# Altium PCB FT232RL Model with USB-C.PcbDoc
Units mil, origin at the board's own origin, x right, y up, seen from the top; angles counter-clockwise.
Board outline 1655 x 760 mil, 2 copper layers (Top Layer, Bottom Layer); 20 components, 28 nets, 107 pads, 45 vias.
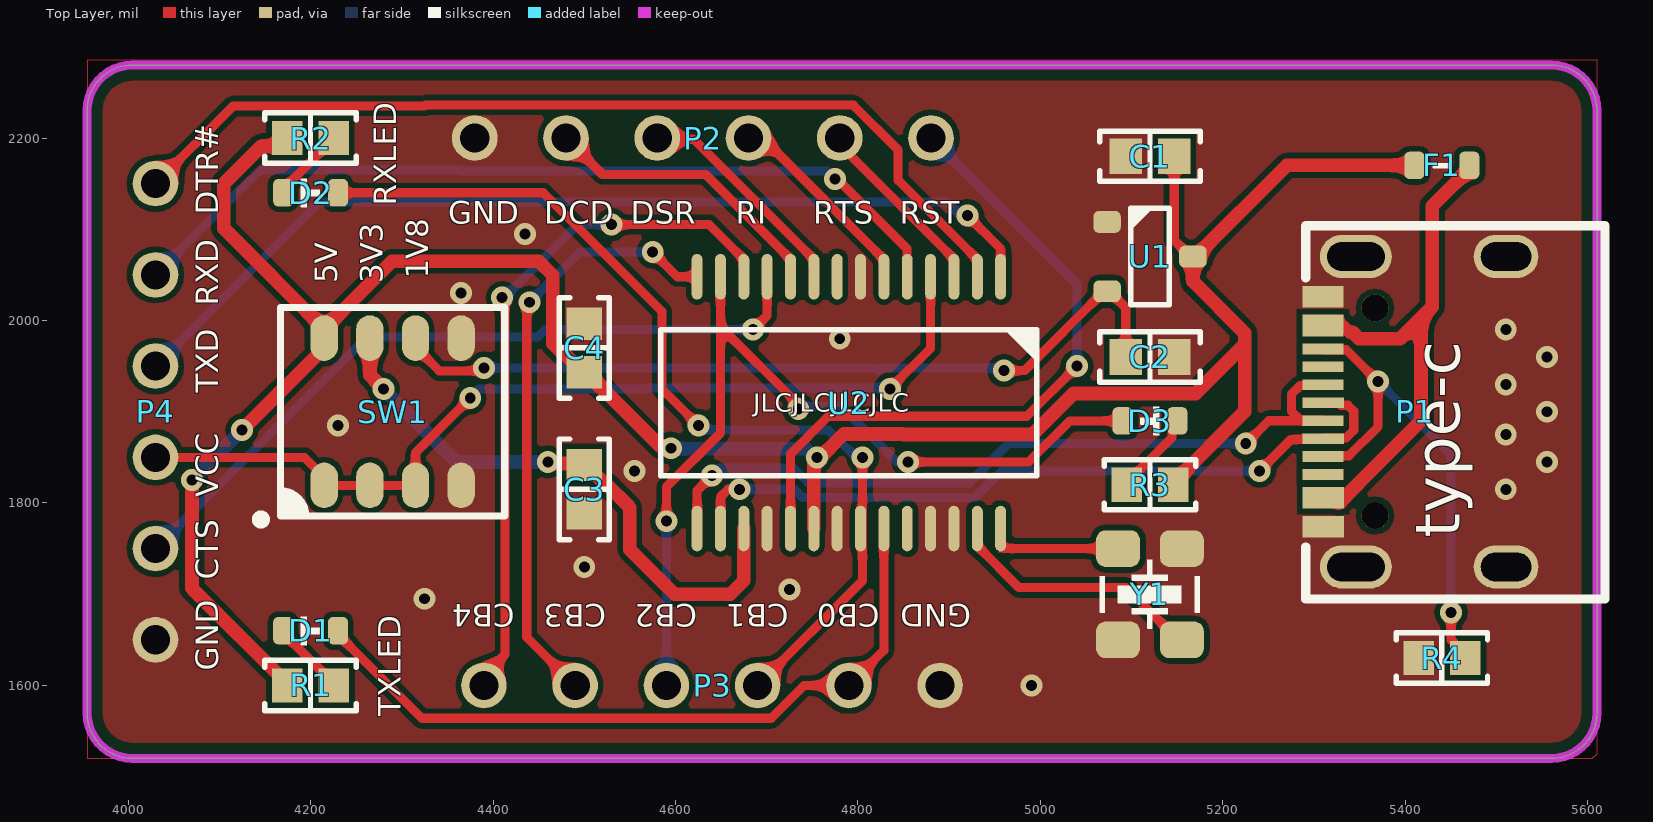
[diagram p0: Top Layer view]
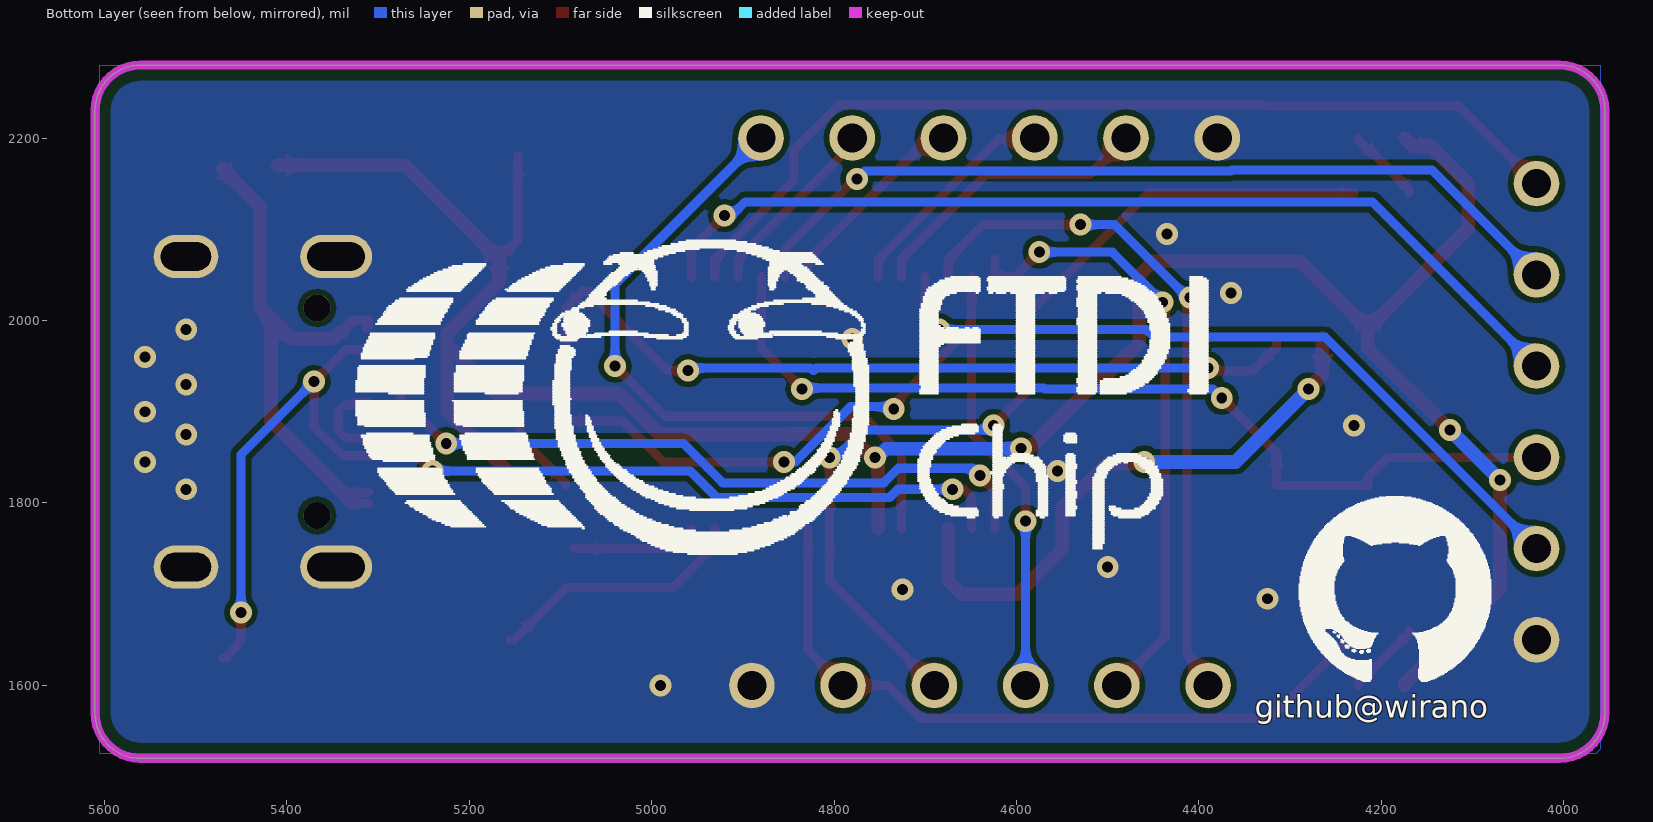
[diagram p1: Bottom Layer view, seen from below]
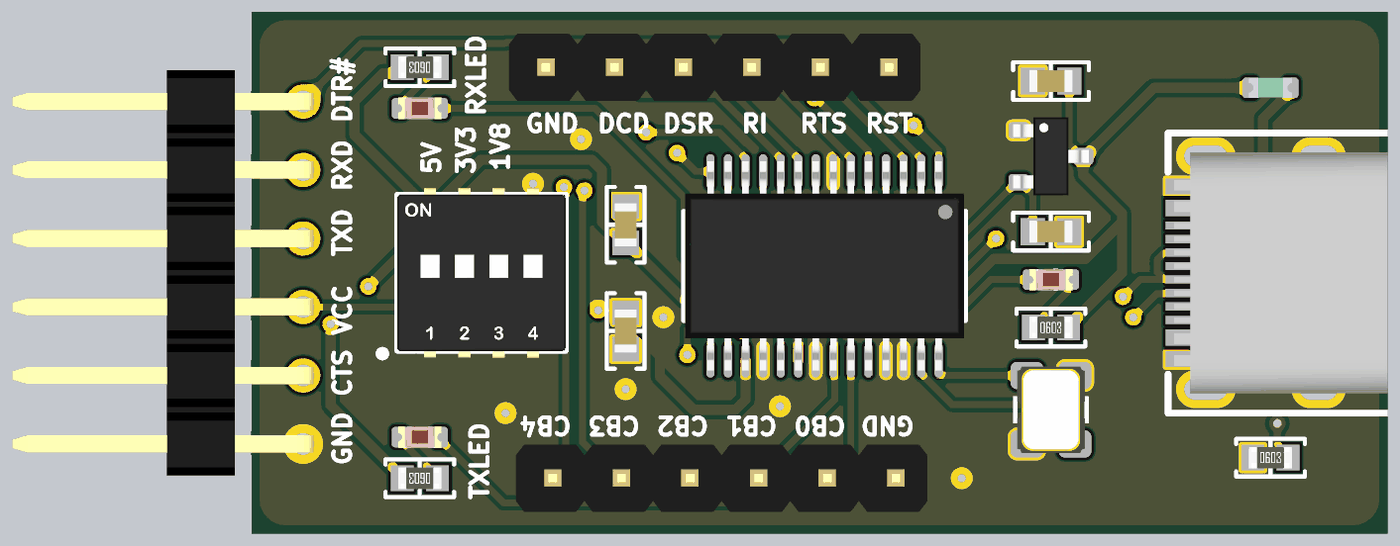
[diagram p2: 3D render of the assembled board from above, using the file's embedded part models]

## Layer stack, top to bottom
Top Solder: solder mask 0.4, Solder Resist, Dk 3.5
Top Layer: signal copper 1.4
Dielectric 1: dielectric 12.6, FR-4, Dk 4.8
Bottom Layer: signal copper 1.4
Bottom Solder: solder mask 0.4, Solder Resist, Dk 3.5

## Board outline
3955,1570 ccw(c4005,1570) 4005,1520 5560,1520 ccw(c5560,1570) 5610,1570 5610,2230 ccw(c5560,2230) 5560,2280 5560.1,2280 4005,2280 ccw(c4005,2230) 3955,2230

## Design rules (kind name [scope] priority, off if disabled: settings)
Clearance keepoutlayer [(InLayerClass('Signal Layers')) vs (OnLayer('Keep-Out Layer'))] p1: gap=12 ignorepadtopadclearanceinfootprint=FALSE
Clearance [All] p2: gap=6 ignorepadtopadclearanceinfootprint=FALSE
HoleSize [All] p1: absolutevalues=TRUE maxlimit=248 minlimit=8 maxpercent=80.000 minpercent=20.000
HoleToHoleClearance [All] p1: gap=6 allowstackedmicrovias=TRUE
MinimumSolderMaskSliver [All] p1: minsoldermaskwidth=5
PolygonConnect [All] p1: connectstyle=Direct reliefconductorwidth=10 reliefentries=4 polygonreliefangle="90 Angle" airgapwidth=10
RoutingVias [All] p1: holewidth=12 width=24 viastyle="Through Hole" minholewidth=12 minwidth=24 maxholewidth=24 maxwidth=32
SilkToSilkClearance [All] p1: silktosilkclearance=1
SilkToSolderMaskClearance [IsPad] p1: minsilkscreentomaskgap=1 clearancetoexposedcopper=TRUE
SolderMaskExpansion [All] p1: expansion=4 istentingtop=FALSE
Width Width_Power [InNet('3V3') And InNet('VCC')  And InNet('VBUS')] p1: maxlimit=100 minlimit=10 preferedwidth=15
Width [All] p2: maxlimit=50 minlimit=6 preferedwidth=10
25 further rules are at their usual default settings.

## Components (designator, comment, footprint, x,y, rotation, side; value= is the part's Value field where it differs from the comment)
C1 "C0603" "CAP 0603/1608" 5120,2180 r0 top value=105
C2 "C0603" "CAP 0603/1608" 5120,1960 r180 top value=105
C3 "C0603" "CAP 0603/1608" 4500,1815 r270 top value=104
C4 "C0603" "CAP 0603/1608" 4500,1970 r270 top value=104
D1 "R" LED_0603_RED 4200,1660 r0 top
D2 "R" LED_0603_RED 4200,2140 r0 top
D3 "R" LED_0603_RED 5120,1890 r180 top
F1 "?mA" PPTC_0603 5440,2170 r180 top
P1 "TypeC" USB_TypeC 5410,1900 r90 top
P2 "DIP 1x6" HDR1X6_2.54_180 4880,2200 r270 top value=2.54
P3 "DIP 1x6" HDR1X6_2.54_180 4890,1600 r270 top value=2.54
P4 "DIP 1x6" HDR1X6_2.54_90 4030,1650 r180 top value=2.54
R1 "R0603" "RES 0603/1608" 4200,1600 r180 top value=1K
R2 "R0603" "RES 0603/1608" 4200,2200 r180 top value=1K
R3 "R0603" "RES 0603/1608" 5120,1820 r0 top value=1K
R4 "R0603" "RES 0603/1608" 5440,1630 r0 top value=5.1K
SW1 "=PartNumber" "CTS 218-4LPJ" 4290,1900 r90 top
U1 "XC6206P182MR" _SOT23-3 5120,2070 r0 top
U2 "FT232R" _SSOP_E210_P0.65_28 4790,1910 r270 top
Y1 "XTAL3225" XT_3225_4 5120,1700 r270 top value=12MHz

## Footprints (in the part's own frame and the unit in brackets; to place one, negate y for a bottom-side part, rotate by r counter-clockwise, add the part's x,y. Pads: shape width x height; smd on the part's side, far side on the other; paste and mask are expansions set on the pad)
_SOT23-3 [mil]
  rrect50% 30x24 smd: 1(-47,38) 2(-47,-38) 3(47,0)
  silkscreen extent -21,-53 21,53, body extent -55,-57 55,57, height 51
_SSOP_E210_P0.65_28 [mil]
  oval 50x12 smd: 1(-138,166.34) 2(-138,140.75) 3(-138,115.16) 4(-138,89.57) 5(-138,63.98) 6(-138,38.39) 7(-138,12.8) 8(-138,-12.8) 9(-138,-38.39) 10(-138,-63.98) 11(-138,-89.57) 12(-138,-115.16) 13(-138,-140.75) 14(-138,-166.34) 15(138,-166.34) 16(138,-140.75) 17(138,-115.16) 18(138,-89.57) 19(138,-63.98) 20(138,-38.39) 21(138,-12.8) 22(138,12.8) 23(138,38.39) 24(138,63.98) 25(138,89.57) 26(138,115.16) 27(138,140.75) 28(138,166.34)
  silkscreen extent -80,-206 80,206, body extent -153,-203 153,203, height 85
"CAP 0603/1608" [mm] "Chip Capacitor, 2-Leads, Body 1.60x0.80mm, IPC Medium Density"
  rect 0.9x1 smd: 1(-0.675,0) 2(0.675,0)
  silkscreen extent -1.4,-0.7 1.4,0.7, body extent -0.8,-0.41 0.8,0.41, height 0.82
"CTS 218-4LPJ" [mm] "DIP, 6 POS, Body 8.79x6.05mm, Pitch 1.27mm, IPC Medium Density"
  oval 1.27x0.76 smd: 1(-2.05,1.905) 2(-2.05,0.635) 3(-2.05,-0.635) 4(-2.05,-1.905) 5(2.05,-1.905) 6(2.05,-0.635) 7(2.05,0.635) 8(2.05,1.905)
  silkscreen extent -3.12,-3.12 2.9,3.79, body extent -3.15,-3.13 3.15,3.12, height 2.71
HDR1X6_2.54_90 [mil]
  round 50 hole 32: 1(0,0) 2(0,-100) 3(0,-200) 4(0,-300) 5(0,-400) 6(0,-500)
  body extent -15,-546 424,46, height 99
HDR1X6_2.54_180 [mil]
  round 50 hole 32: 1(0,0) 2(0,-100) 3(0,-200) 4(0,-300) 5(0,-400) 6(0,-500)
  body extent -49,-550 49,50, height 323
LED_0603_RED [mil]
  rrect50% 22x30 smd: 1(-30,0) 2(30,0)
  silkscreen extent -10,-16 10,16, body extent -31,-16 32,16, height 21
PPTC_0603 [mil]
  rrect50% 22x30 smd: 1(-30,0) 2(30,0)
  silkscreen extent -10,-3 10,3, body extent -31,-15 32,15, height 30
"RES 0603/1608" [mm] "Chip Resistor, 2-Leads, Body 1.60x0.80mm, IPC Medium Density"
  rect 0.85x0.95 smd: 1(-0.65,0) 2(0.65,0)
  silkscreen extent -1.27,-0.7 1.27,0.7, body extent -0.8,-0.4 0.8,0.4, height 0.48
USB_TypeC [mm]
  oval 1.2x1.8 hole 0.8 slot 1.4 at 90 deg: 0(-4.32,-2.547) 0(4.32,-2.547)
  oval 1.2x2 hole 0.8 slot 1.6 at 90 deg: 0(-4.32,1.633) 0(4.32,1.633)
  rect 0.3x1.15 smd: A1(-3.35,2.546) A4(-2.55,2.543) A5(-1.25,2.547) A6(-0.25,2.547) A7(0.25,2.546) A8(-1.75,2.547) A9(2.55,2.547) A12(3.35,2.547) B1(3.05,2.547) B4(2.25,2.547) B5(1.75,2.547) B6(0.75,2.547) B7(-0.75,2.546) B8(1.25,2.547) B9(-2.25,2.543) B12(-3.05,2.546)
  round 0.75 hole 0.75 unplated: ""(-2.89,1.102) ""(2.89,1.102)
  silkscreen extent -5.21,-5.3 5.18,3.03, body extent -4.47,-5.1 4.47,2.8, height 3.21
XT_3225_4 [mil]
  rrect50% 40x48 smd: 1(-50,-35) 2(50,-35) 3(50,35) 4(-50,35)
  silkscreen extent -38,-55 38,55, body extent -63,-49 63,49, height 41

## Part data
C1 C2 C3 C4: library part Cap_0603, "Capacitor", Specification="X7R 50V", Type=0603
D1 D2 D3: library part LED_0603, "LED", Type=0603
F1: library part Fuse, "resettable fuse"
P1: library part USB_TypeC, "USB type-c cable"
P2 P3 P4: library part HDR1x6_2.54, "Header", Type="DIP 1x6"
R1 R2 R3 R4: library part Res_0603, "SMT Resistor", Specification=±5%, Type=0603
SW1: library part 218-4LPSTR, "SWITCH SLIDE DIP SPST 25MA 24V", Current Rating (Amps)=25mA, Manufacturer="CTS Electrocomponents", Operating Temperature="-55°C ~ 85°C", Supplier Part Number 1=CT3110CT-ND, Voltage Rating=24VDC, Actuator Level="Flush, Recessed", Actuator Type="Slide (Standard)", Circuit=SPST, ComponentLink1Description=Datasheet, ComponentLink1URL=https://www.ctscorp.com/wp-content/uploads/218.pdf, ComponentLink2Description="DigiKey Link", ComponentLink2URL=http://digikey.com/product-detail/en/cts-electrocomponents/218-4LPSTR/CT3110CT-ND/5875763, Contact Finish=Gold, Contact Material="Beryllium Copper", Features="Epoxy Sealed Terminals, Tape Seal", Height Above Board="0.104\" (2.65mm)", LastUpdated="20/1/4 周六 18:53:14", Lifecycle Status=Active, Minimum Order=1, Mounting Type="Surface Mount", Number of Positions=4, Packaging=ReReel, Part Number=218-4LPSTR, Part Status=Active, PartId=9, Pitch="0.050\" (1.27mm), Half", Price=0.00, Series=218, Supplier 1=DigiKey, Termination Style="Gull Wing", Washable=Yes
U1: library part XC6206P332MR, "Regulator LDO"
U2: "USB to UART Converter"
Y1: library part XTAL_3225_4P, "Crystal Oscillator", Type=XTAL3225

## Via types
v1: diameter 24, hole 12, Top Layer to Bottom Layer, 45 vias

## Nets (pads, with @x,y where several pads share a name; then routed paths per layer and width w, separated by ;. In a path a pad name is that pad's centre, name@x,y a point inside that pad or via, vN(x,y) a via of type N, cw(c..) or ccw(c..) an arc to the next point about the centre after c; other vN are vias at no path point)
1V8: C2.2 SW1.6 U1.2 | length 901.8
  Top Layer w10: SW1.6 4315,1970.67 4340.96,1944.71 4386.71,1944.71 v1(4390,1948) ; v1(4960,1945) 4982.46,1945 5069.46,2032 U1.2 5075.46,2032 5093.43,2014.03 C2.2
  Bottom Layer w10: v1(4390,1948) 4819.47,1948 4822.47,1945 4825.47,1948 4957,1948 v1(4960,1945)
3V3: C3.1 SW1.7 U2.17 | length 640.3
  Top Layer w15: SW1.7 4265,1940 v1(4280,1925) ; v1(4460,1845) 4461.71,1843.29 4498.29,1843.29 C3.1 4501.97,1841.57 4522.79,1820.75 4524.17,1820.75 4550,1794.92 4550,1748.82 4598.82,1700 4660,1700 4674.84,1714.84 U2.17
  Bottom Layer w15: v1(4280,1925) 4360,1845 v1(4460,1845)
CBUS0: D1.2 P3.2 U2.23 | length 804.9
  Top Layer w10: D1.2 4230,1656 4322,1564 4704.91,1564 4740.91,1600 P3.2 4828.39,1638.39 U2.23
CBUS1: D2.2 P3.3 U2.22 | length 1042.5
  Top Layer w10: D2.2 4455,2140 4585,2010 4585,1925 v1(4625,1885) ; P3.3 4805,1715 v1(4805,1850)
  Bottom Layer w10: v1(4625,1885) 4630,1880 4767.53,1880 4797.53,1850 v1(4805,1850)
CBUS2: D3.2 P3.4 U2.13 | length 998.4
  Top Layer w10: v1(4590,1780) 4590,1817.47 4649.25,1876.72 4649.25,1993.22 ; U2.13 4649.25,1993.22 ; v1(4734.51,1903) 4732.85,1904.66 4732.85,1909.62 4649.25,1993.22 ; v1(4855,1845) 4987.33,1845 5032.33,1890 D3.2
  Bottom Layer w10: P3.4 v1(4590,1780) ; v1(4734.51,1903) 4737.11,1905.6 4781.92,1905.6 4842.53,1845 v1(4855,1845)
CBUS3: P3.5 U2.14 | length 680.4
  Top Layer w10: v1(4440,2020) 4437,2017 4437,1653 P3.5 ; v1(4575,2075) 4602,2048 U2.14 U2.14@4623.66,2067.54
  Bottom Layer w10: v1(4440,2020) 4495,2075 v1(4575,2075)
CBUS4: P3.6 U2.12 | length 768.5
  Top Layer w10: P3.6 4390,1610.82 4413,1633.82 4413,2022 v1(4410,2025) ; v1(4530,2105) 4636.84,2105 4674.84,2067 U2.12
  Bottom Layer w10: v1(4410,2025) 4412.47,2025 4492.47,2105 v1(4530,2105)
CC: P1.A5 P1.B5 R4.2 | length 546.2
  Top Layer w10: P1.A5 5310.61,1851.7 5337.97,1851.7 5370,1883.73 v1(5370,1933) 5335.01,1967.99 5310.61,1967.99 P1.B5 ; v1(5450,1680) 5450,1650 5453.86,1646.14 5453.86,1643.7 R4.2@5467.56,1630 ; R4.2 R4.2@5467.56,1630 ; R4.2@5470,1630 R4.2@5467.56,1630
  Bottom Layer w10: v1(5370,1933) 5450,1853 v1(5450,1680)
CTS#: P4.2 U2.11 | length 818.8
  Top Layer w10: v1(4685,1990) 4700.43,2005.43 U2.11
  Bottom Layer w10: P4.2 4262,1982 4449.53,1982 4457.53,1990 v1(4685,1990)
D+: P1.A6 P1.B6 U2.15 | length 869.3
  Top Layer w10: U2.15 4623.66,1813.66 v1(4640,1830) ; v1(5225,1865) 5250.16,1890.16 P1.A6 5308.8,1891.07 5284.44,1891.07 5275,1900.51 5275,1919.17 5284.45,1928.62 5308.8,1928.62 P1.B6
  Bottom Layer w10: v1(4640,1830) 4648,1838 4729.47,1838 4745.47,1822 4921.87,1822 4964.87,1865 v1(5225,1865)
D-: P1.A7 P1.B7 U2.16 | length 824.7
  Top Layer w10: U2.16 4649.25,1806.56 4657.7,1815 v1(4670,1815) ; v1(5240,1835) 5274.56,1869.56 5308.86,1869.56 P1.B7 5310.67,1871.38 5335.02,1871.38 5343.34,1879.7 5343.34,1900.62 5336.9,1907.07 5329.27,1907.07 5326.5,1909.84 P1.A7
  Bottom Layer w10: v1(4670,1815) 4729.85,1815 4738.85,1806 4928.5,1806 4957.5,1835 v1(5240,1835)
DCD#: P2.5 U2.10 | length 320.1
  Top Layer w10: P2.5 4520,2160 4633.02,2160 4726.02,2067 U2.10
DSR#: P2.4 U2.9 | length 245.7
  Top Layer w10: P2.4 4581.39,2198.61 4620,2198.61 4751.61,2067 U2.9
DTR#: P4.6 U2.2 | length 1044.8
  Top Layer w10: P4.6 4115,2235 4325,2235 4326,2236 4794.91,2236 4844,2186.91 4844,2153.75 4930.75,2067 U2.2
GND: C1.1 C2.1 C3.2 C4.1 P1.0 P1.A1 P1.A12 P1.B1 P1.B12 P2.6 P3.1 P4.1 R4.1 SW1.4 SW1.5 U1.1 U2.7 U2.18 U2.21 U2.25 U2.26 Y1.2 Y1.4
  other v1: 4990,1600 4325,1695 4725,1705 4500,1730 5510,1815 4555,1835 5555,1845 5510,1875 4230,1885 5555,1900 5510,1930 5555,1960 4780,1980 5510,1990 4365,2030 4435,2095
NetD1_1: D1.1 R1.1 | length 83.8
  Top Layer w10: D1.1 4170,1656.27 4175.96,1650.31 4177.25,1650.31 4225.59,1601.97 R1.1
NetD2_1: D2.1 R2.1 | length 83.9
  Top Layer w10: D2.1 4170,2144 4212.3,2186.3 4213.86,2186.3 4225.59,2198.03 R2.1
NetD3_1: D3.1 R3.1 | length 93
  Top Layer w10: R3.1 5094.41,1821.97 5144.31,1871.87 5144.31,1884.31 D3.1
RESET: P2.1 U2.19 | length 751.8
  Top Layer w10: U2.19 4726.02,1853.55 4767.47,1895 4985,1895 v1(5040,1950)
  Bottom Layer w10: P2.1 5040,2040 v1(5040,1950)
RI#: P2.3 U2.6 | length 222.5
  Top Layer w10: P2.3 4687.65,2192.35 4703.04,2192.35 4828.39,2067 U2.6
RTS#: P2.2 U2.3 | length 203.8
  Top Layer w10: P2.2 4780,2192.7 4905.16,2067.54 U2.3
RXD: P4.5 U2.5 | length 938
  Top Layer w10: v1(4775,2155) 4777.5,2155 4853.59,2078.91 4853.59,2048.38 U2.5
  Bottom Layer w10: P4.5 4145,2165 4364.09,2165 4365.09,2164 4766,2164 v1(4775,2155)
TXD: P4.4 U2.1 | length 1052.8
  Top Layer w10: v1(4920,2115) 4956.34,2078.66 U2.1
  Bottom Layer w10: P4.4 4210,2130 4897.14,2130 4909.46,2117.68 4917.32,2117.68 v1(4920,2115)
VBUS: F1.1 P1.A4 P1.A9 P1.B4 P1.B9 | length 604.7
  Top Layer w10: 5309.7,1994.49 P1.B4@5312.66,1991.54 ; P1.A9 5326.44,2000.4 5339.59,1987.24 ; P1.A4 P1.A4@5326.6,1799.61 ; P1.B9 5309.95,1811.51 5338.49,1811.51 ; F1.1@5470,2166 F1.1
  Top Layer w15: P1.A4@5326.6,1799.61 5338.49,1811.51 5417.07,1890.08 5417.07,2002.93 ; 5339.59,1987.24 5341.92,1987.24 5349.17,1980 5394.14,1980 5417.07,2002.93 ; F1.1@5470,2166 5429.23,2125.23 5429.23,2015.08 5417.07,2002.93
VCC: C1.2 C4.2 F1.2 R1.2 R2.2 R3.2 SW1.8 U1.3 U2.20 | length 2791.8
  Top Layer w10: C1.2 5146.57,2087.97 5164.54,2070 U1.3 U1.3@5170,2070
  Top Layer w15: v1(4070,1825) 4070,1706.38 4174.41,1601.97 R1.2 ; v1(4125,1880) 4215,1970 SW1.8 SW1.8@4215,1990.75 ; R2.2 4165.49,2191.08 4146.08,2191.08 4105,2150 4105,2100.75 SW1.8@4215,1990.75 ; v1(4595,1860) 4593.28,1861.72 4583.67,1861.72 4501.97,1943.43 C4.2 4498.03,1943.43 4477.21,1964.25 4475.83,1964.25 4465.5,1974.58 4465.5,2049.5 4450,2065 4289.25,2065 SW1.8@4215,1990.75 ; U2.20 4751.61,1846.61 v1(4755,1850) ; v1@4763.94,1855 4784.44,1875.5 4848.94,1875.5 4849.44,1875 4991.16,1875 5036.16,1920 5170,1920 5223.79,1973.79 ; R3.2 5145.59,1821.97 5223.79,1900.16 5223.79,1973.79 ; U1.3 5167,2043 5223.79,1986.21 5223.79,1973.79 ; U1.3@5170,2070 5270,2170 F1.2
  Bottom Layer w15: v1(4070,1825) v1(4125,1880) ; v1(4595,1860) 4595.5,1859.5 4743.06,1859.5 4752.56,1850 v1(4755,1850)
VCCIC: P4.3 SW1.1 SW1.2 SW1.3 U2.4 | length 1030
  Top Layer w10: P4.3 4193.3,1850 4215,1828.3 SW1.1 SW1.3 4315,1855 v1(4375,1915) ; v1(4835,1925) 4879.57,1969.57 U2.4
  Bottom Layer w10: v1(4375,1915) 4385,1925 4569.02,1925 4570.02,1926 4834,1926 v1(4835,1925)
XI: U2.28 Y1.1 | length 148.6
  Top Layer w10: U2.28 4956.34,1753.54 4959.88,1750 Y1.1
XO: U2.27 Y1.3 | length 285.9
  Top Layer w10: U2.27 4930.75,1753 4976.48,1707.27 5093.73,1707.27 5151,1650 Y1.3
pads on no net: P1. P1.A8 P1.B8 U2.8 U2.24

## Polygon pours and split planes (outlines as drawn)
GND on Top Layer "GND_L01_P002" (solid, pour order 2): 3955,2285 3955,1520 5605,1520 5610,1525 5610,2285
GND on Top Layer "NONET_L01_P000" (solid, shelved, pour order 0): 3955,2285 3955,1520 5605,1520 5610,1525 5610,2285
GND on Bottom Layer "GND_L02_P003" (solid, pour order 3): 3960,2280 3960,1515 3970,1525 5605,1525 5605,2280
GND on Bottom Layer "NONET_L02_P001" (solid, shelved, pour order 1): 3960,2280 3960,1530 3965,1525 5605,1525 5605,2280

## Keep-outs
Keep-Out Layer:
  lines w10: 5560,2280 cw(c5560,2230) 5610,2230 ; 5560.1,2280 4005,2280 ccw(c4005,2230) 3955,2230 3955,1570 ccw(c4005,1570) 4005,1520 5560,1520 ccw(c5560,1570) 5610,1570 5610,2230.1

## Silkscreen, mask and mechanical layers (free items; w line width, h text height)
Top Overlay:
  text "RXLED" at 4294,2126 h25 r90
  text "DTR#" at 4099,2116 h25 r90
  text "GND" at 4351,2106 h25
  text "DCD" at 4456,2106 h25
  text "DSR" at 4551,2106 h25
  text "RI" at 4666,2106 h25
  text "RTS" at 4751,2106 h25
  text "RST" at 4846,2106 h25
  text "1V8" at 4329,2046 h25 r90
  text "5V" at 4229,2041 h25 r90
  text "3V3" at 4279,2041 h25 r90
  text "RXD" at 4099,2016 h25 r90
  text "TXD" at 4099,1921 h25 r90
  text "JLCJLCJLCJLC" at 4685,1900 h20
  text "VCC" at 4099,1806 h25 r90
  text "CTS" at 4099,1716 h25 r90
  text "CB4" at 4424,1689 h25 r180
  text "CB3" at 4524,1689 h25 r180
  text "CB2" at 4624,1689 h25 r180
  text "CB1" at 4724,1689 h25 r180
  text "CB0" at 4824,1689 h25 r180
  text "GND" at 4924,1689 h25 r180
  text "GND" at 4099,1616 h25 r90
  text "TXLED" at 4299,1566 h25 r90
Bottom Overlay:
  drawing of 1784 lines, arcs and shapes, not listed
  text "github@wirano" at 4339,1564.33 h25

## Text inside footprints (layer, text, board x,y; h text height)
P1: Top Overlay "type-c" at 5459.7,1761.89 h50 r90